# Altium PCB MP1584s.PcbDoc
Units mm, origin at the board's own origin, x right, y up, seen from the top; angles counter-clockwise.
Board outline 32 x 21.13 mm, 2 copper layers (Top Layer, Bottom Layer); 30 components, 11 nets, 71 pads, 205 vias.
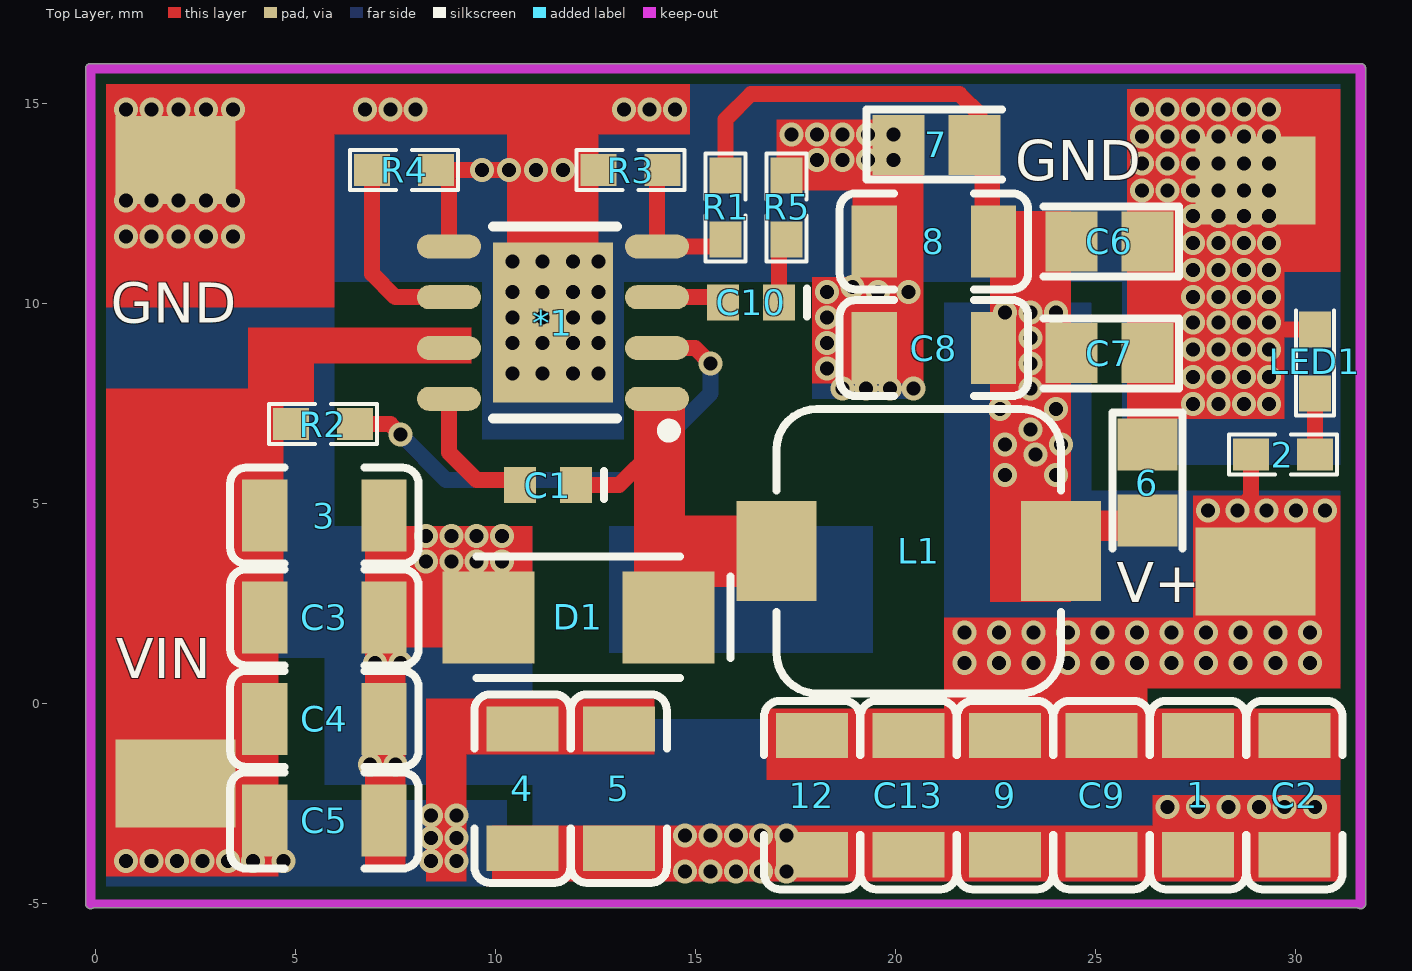
[diagram p0: Top Layer view]
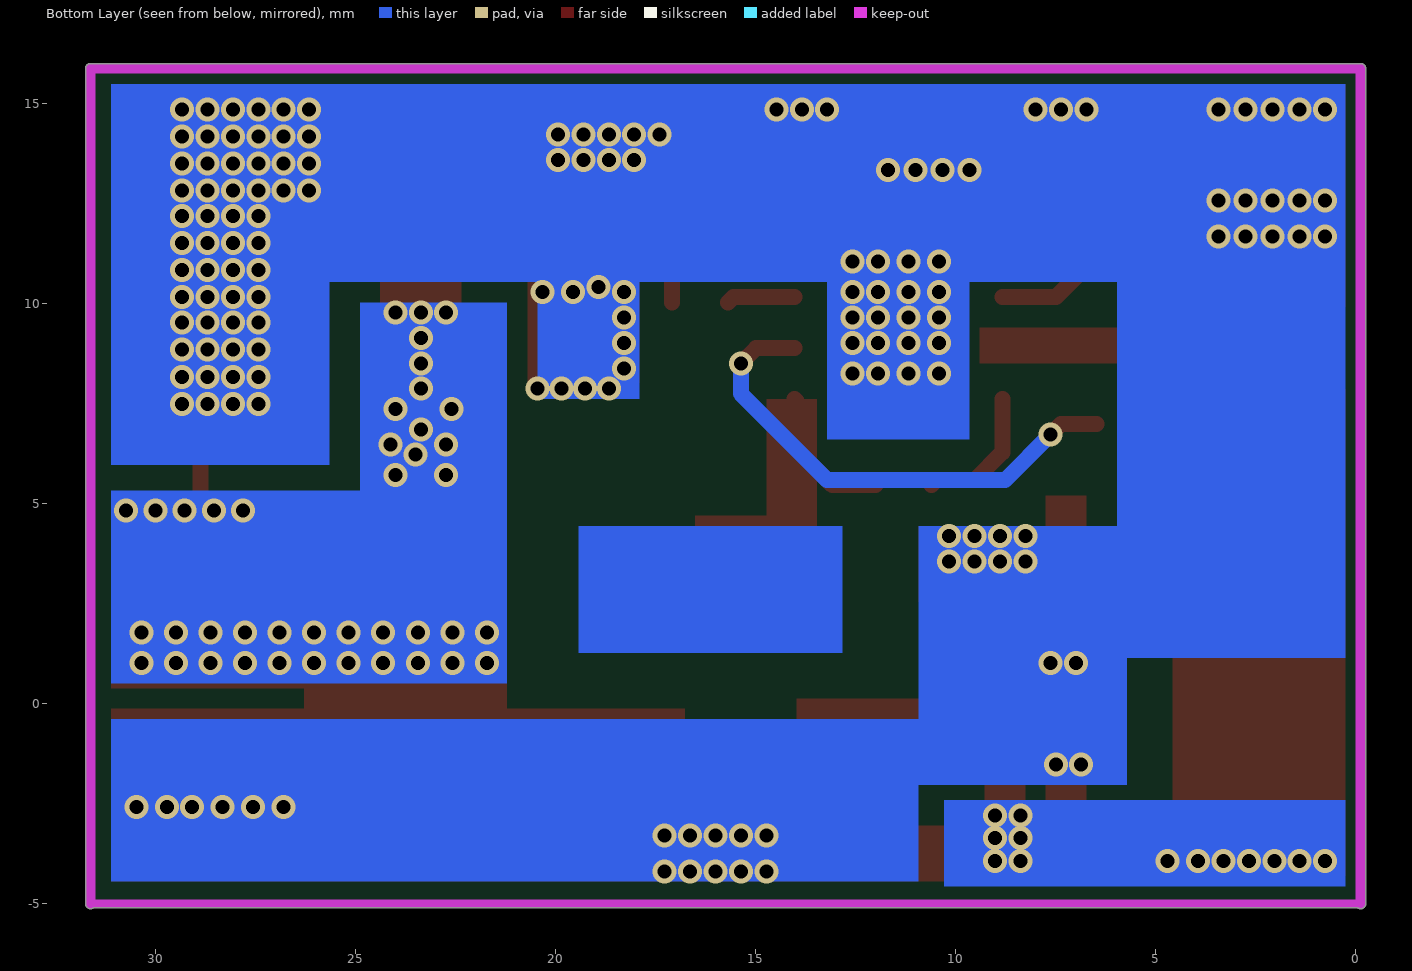
[diagram p1: Bottom Layer view, seen from below]

## Layer stack, top to bottom
Top Solder: solder mask 0.0102, Solder Resist, Dk 3.5
Top Layer: signal copper 0.0356
Dielectric 1: dielectric 0.32, FR-4, Dk 4.8
Bottom Layer: signal copper 0.0356
Bottom Solder: solder mask 0.0102, Solder Resist, Dk 3.5

## Board outline
-0.254,-5 -0.254,15.875 cw(c-0.127,15.875) -0.127,16.002 31.623,16.002 cw(c31.623,15.875) 31.75,15.875 31.75,-5 cw(c31.623,-5) 31.545,-5.1 -0.049,-5.1 cw(c-0.127,-5)

## Design rules (kind name [scope] priority, off if disabled: settings)
Clearance [All] p1: gap=0.254 ignorepadtopadclearanceinfootprint=FALSE except(0: Arc-Hole Track-Hole SMDPad-Hole THPad-Hole Via-Hole Fill-Hole Poly-Hole Region-Hole Text-Hole)
PolygonConnect [All] p1: connectstyle=Relief reliefconductorwidth=0.254 reliefentries=4 polygonreliefangle="90 Angle" airgapwidth=0.254
RoutingVias [All] p1: holewidth=0.4 width=0.6 viastyle="Through Hole" minholewidth=0.4 minwidth=0.6 maxholewidth=22 maxwidth=55
SolderMaskExpansion [All] p1: expansion=0.102
Width [All] p1: maxlimit=55 minlimit=0.254 preferedwidth=0.254
30 further rules are at their usual default settings.

## Components (designator, comment, footprint, x,y, rotation, side; value= is the part's Value field where it differs from the comment)
1 "10UF" LC-1206_C 27.559,-2.286 r90 top
2 "470R" R-0603 30.48,6.223 r180 top
3 "10UF" LC-1206_C 5.715,4.699 r180 top
4 "10UF" LC-1206_C 10.668,-2.125 r90 top
5 "10UF" LC-1206_C 13.081,-2.125 r90 top
6 "22UF" C-0805 26.289,6.477 r270 top
7 "22UF" C-0805 20.066,13.97 r0 top
8 "10UF" LC-1206_C 20.955,11.557 r0 top
9 "10UF" LC-1206_C 22.733,-2.286 r90 top
12 "10UF" LC-1206_C 17.907,-2.286 r90 top
*1 "MP1584DN" LC-SOIC-8_EP_150mil 11.43,9.525 r90 top
C1 "100NF" CAPC1608L 11.303,5.461 r180 top
C2 "10UF" LC-1206_C 29.972,-2.286 r90 top
C3 "10UF" LC-1206_C 5.715,2.159 r180 top
C4 "10UF" LC-1206_C 5.715,-0.381 r180 top
C5 "10UF" LC-1206_C 5.715,-2.921 r180 top
C6 "22UF" C-0805 26.289,11.557 r180 top
C7 "22UF" C-0805 26.289,8.763 r180 top
C8 "10UF" LC-1206_C 20.955,8.89 r0 top
C9 "10UF" LC-1206_C 25.146,-2.286 r90 top
C10 "220PF" CAPC1608L 16.383,10.033 r180 top
C13 "10UF" LC-1206_C 20.32,-2.286 r90 top
D1 "D-Schottky" DIODE-SMA 12.065,2.159 r0 top
L1 "Inductor" L-SMD-7 20.574,3.81 r0 top
LED1 "red" L-0603 30.48,7.747 r90 top
R1 "150K" R-0603 15.748,13.208 r270 top
R2 "100K" R-0603 6.477,6.985 r180 top
R3 "35K" R-0603 12.573,13.335 r0 top
R4 "200K" R-0603 8.509,13.335 r180 top
R5 "68.1K" R-0603 17.272,13.208 r270 top

## Footprints (in the part's own frame and the unit in brackets; to place one, negate y for a bottom-side part, rotate by r counter-clockwise, add the part's x,y. Pads: shape width x height; smd on the part's side, far side on the other; paste and mask are expansions set on the pad)
C-0805 [mm]
  rect 1.3x1.5 smd: 1(0,0) 2(1.9,0)
  silkscreen extent -0.8,-0.87 2.6,0.88
CAPC1608L [mm] "Chip Capacitor, Body 1.6x0.8mm, IPC High Density"
  rect 0.8x0.9 smd: 1(-0.7,0) 2(0.7,0)
  silkscreen extent -1.4,-0.35 -1.4,0.35, body extent -0.87,-0.48 0.87,0.48, height 0.85
DIODE-SMA [mm] "贴片二极管"
  rect 2.3x2.3 smd: 1(-2.25,0) 2(2.25,0)
  silkscreen extent -2.54,-1.52 3.81,1.52, body extent -2.92,-1.4 2.92,1.4, height 3
L-0603 [mm]
  rect 0.9x0.8 smd: 1(0,0) 2(1.6,0)
  silkscreen extent -0.55,-0.48 2.08,0.47
L-SMD-7 [mm] "贴片电感7*7"
  rect 2x2.5 smd: 1(-3.556,0) 2(3.556,0)
  silkscreen extent -3.56,-3.56 3.56,3.56, body extent -3.56,-3.56 3.56,3.56, height 4
LC-1206_C [mm]
  rect 1.13x1.8 smd: 1(-1.49,0) 2(1.49,0)
  silkscreen extent -2.36,-1.2 2.35,1.2, body extent -1.6,-0.81 1.6,0.79, height 1
LC-SOIC-8_EP_150mil [mm]
  rect 4x3 smd: 0(0,0)
  oval 0.6x1.6 smd: 1(-1.905,-2.6) 2(-0.635,-2.6) 3(0.635,-2.6) 4(1.905,-2.6) 5(1.905,2.6) 6(0.635,2.6) 7(-0.635,2.6) 8(-1.905,2.6)
  silkscreen extent -2.85,-3.05 2.4,1.5
R-0603 [mm]
  rect 0.9x0.8 smd: 1(0,0) 2(1.6,0)
  silkscreen extent -0.55,-0.5 2.15,0.5

## Part data
1 3 4 5 6 7 8 9 12 C2 C3 C4 C5 C6 C7 C8 C9 C13: library part CAP, "Capacitor"
2 R1 R2 R3 R4 R5: library part RES, "Resistor"
C1 C10: library part C0603-100nF/50V, "X7R"
D1: "肖特基二极管"
L1: library part Inductor_2, "电感"
LED1: library part LED, "Typical RED, GREEN, YELLOW, AMBER GaAs LED"

## Free pads (board coordinates)
  rect 3x2.2 smd: 0(2,13.589) 1(2,-2) 2(29,3.302) 3(29,13.081)

## Via types
v1: diameter 0.6, hole 0.35, Top Layer to Bottom Layer, 205 vias

## Nets (pads, with @x,y where several pads share a name; then routed paths per layer and width w, separated by ;. In a path a pad name is that pad's centre, name@x,y a point inside that pad or via, vN(x,y) a via of type N, cw(c..) or ccw(c..) an arc to the next point about the centre after c; other vN are vias at no path point)
5V5: 1.2 2.2 6.2 7.2 8.2 9.2 12.2 C2.2 C6.2 C7.2 C8.2 C9.2 C13.2 L1.2 pad.2 R1.1 | length 10.6
  Top Layer w0.4: R1.1 15.748,14.605 16.383,15.24 21.59,15.24 22.098,14.732 21.966,14.6 7.2 ; v1(28.543,4.826) 28.88,5.163 2.2
  other v1: 21.717,1.016 22.581,1.016 23.444,1.016 24.308,1.016 25.171,1.016 26.035,1.016 26.899,1.016 27.762,1.016 28.626,1.016 29.489,1.016 30.353,1.016 21.717,1.778 22.581,1.778 23.444,1.778 24.308,1.778 25.171,1.778 26.035,1.778 26.899,1.778 27.762,1.778 28.626,1.778 29.489,1.778 30.353,1.778 27.813,4.826 29.273,4.826 30.004,4.826 30.734,4.826 22.733,5.715 24.003,5.715 23.495,6.223 22.733,6.477 24.13,6.477 23.368,6.858 22.606,7.366 24.003,7.366 23.368,7.874 23.368,8.509 23.368,9.144 22.733,9.779 23.368,9.779 24.003,9.779
GND: 1.1 3.1 4.1 5.1 6.1 7.1 8.1 9.1 12.1 *1.0 *1.5 C2.1 C3.1 C4.1 C5.1 C6.1 C7.1 C8.1 C9.1 C13.1 D1.1 LED1.2 pad.0 pad.3 R3.1 R4.1 R5.1 | length 7.3
  Top Layer w0.4: *1.5 8.83,13.014 R4.1 R3.1 ; v1(29.337,9.525) 29.515,9.347 LED1.2
  other v1: 14.732,-4.191 15.367,-4.191 16.002,-4.191 16.637,-4.191 17.272,-4.191 14.732,-3.302 15.367,-3.302 16.002,-3.302 16.637,-3.302 17.272,-3.302 26.797,-2.586 27.559,-2.586 28.321,-2.586 29.083,-2.586 29.718,-2.586 30.48,-2.586 6.858,-1.524 7.493,-1.524 6.985,1.016 7.62,1.016 8.255,3.556 8.89,3.556 9.525,3.556 10.16,3.556 8.255,4.191 8.89,4.191 9.525,4.191 10.16,4.191 27.432,7.493 28.067,7.493 28.702,7.493 29.337,7.493 18.669,7.874 19.262,7.874 19.854,7.874 20.447,7.874 27.432,8.17 28.067,8.17 28.702,8.17 29.337,8.17 10.414,8.255 11.176,8.255 11.938,8.255 12.573,8.255 18.288,8.382 27.432,8.848 28.067,8.848 28.702,8.848 29.337,8.848 10.414,9.017 11.176,9.017 11.938,9.017 12.573,9.017 18.288,9.017 27.432,9.525 28.067,9.525 28.702,9.525 10.414,9.652 11.176,9.652 11.938,9.652 12.573,9.652 18.288,9.652 27.432,10.16 28.067,10.16 28.702,10.16 29.337,10.16 10.414,10.287 11.176,10.287 11.938,10.287 12.573,10.287 18.288,10.287 19.558,10.287 20.32,10.287 18.923,10.414 27.432,10.837 28.067,10.837 28.702,10.837 29.337,10.837 10.414,11.049 11.176,11.049 11.938,11.049 12.573,11.049 27.432,11.515 28.067,11.515 28.702,11.515 29.337,11.515 0.762,11.684 1.397,11.684 2.074,11.684 2.752,11.684 3.429,11.684 27.432,12.192 28.067,12.192 28.702,12.192 29.337,12.192 0.762,12.573 1.397,12.573 2.074,12.573 2.752,12.573 3.429,12.573 26.162,12.827 26.797,12.827 27.432,12.827 28.067,12.827 28.702,12.827 29.337,12.827 9.652,13.335 10.329,13.335 11.007,13.335 11.684,13.335 26.162,13.504 26.797,13.504 27.432,13.504 28.067,13.504 28.702,13.504 29.337,13.504 18.034,13.589 18.669,13.589 19.304,13.589 19.939,13.589 26.162,14.182 26.797,14.182 27.432,14.182 28.067,14.182 28.702,14.182 29.337,14.182 17.399,14.224 18.034,14.224 18.669,14.224 19.304,14.224 19.939,14.224 0.762,14.859 1.397,14.859 2.074,14.859 2.752,14.859 3.429,14.859 6.731,14.859 7.366,14.859 8.001,14.859 13.208,14.859 13.843,14.859 14.478,14.859 26.162,14.859 26.797,14.859 27.432,14.859 28.067,14.859 28.702,14.859 29.337,14.859
Net2_1: 2.1 LED1.1 | length 1.5
  Top Layer w0.4: 2.1 LED1.1
Net*1_1: *1.1 C1.1 D1.2 L1.1 | length 3.6
  Top Layer w0.4: C1.1 13.081,5.461 13.97,6.35 13.97,7.56 *1.1
Net*1_2: *1.2 R2.1 | length 12.6
  Top Layer w0.4: R2.1 7.366,6.985 v1(7.62,6.731) ; *1.2 14.986,8.89 v1(15.367,8.509)
  Bottom Layer w0.4: v1(7.62,6.731) 8.763,5.588 13.208,5.588 15.367,7.747 v1(15.367,8.509)
Net*1_3: *1.3 C10.2 | length 1.7
  Top Layer w0.4: *1.3 15.556,10.16 C10.2
Net*1_4: *1.4 R1.2 R3.2 | length 3.8
  Top Layer w0.4: R3.2 14.03,13.192 *1.4 15.57,11.43 R1.2
Net*1_6: *1.6 R4.2 | length 4.8
  Top Layer w0.4: R4.2 6.909,10.744 7.493,10.16 *1.6
Net*1_8: *1.8 C1.2 | length 3.5
  Top Layer w0.4: *1.8 8.83,6.283 9.525,5.588 10.476,5.588 C1.2
NetC10_1: C10.1 R5.2 | length 1.7
  Top Layer w0.4: C10.1 17.083,11.419 R5.2
VIN: 3.2 4.2 5.2 *1.7 C3.2 C4.2 C5.2 pad.1 R2.2
  other v1: 0.762,-3.937 1.397,-3.937 2.032,-3.937 2.667,-3.937 3.302,-3.937 3.937,-3.937 4.699,-3.937 8.382,-3.937 9.017,-3.937 8.382,-3.365 9.017,-3.365 8.382,-2.794 9.017,-2.794

## Keep-outs
Keep-Out Layer:
  lines w0.2: -0.127,-5 31.623,-5
  lines w0.254: -0.127,-5 -0.127,15.875 31.623,15.875 31.623,-5

## Other copper
Top Layer:
  rectangle net GND: 26.416,-3.048 31.115,-2.286
  rectangle net 5V5: 21.209,-0.381 26.289,0.381
  rectangle net 5V5: 16.764,-1.905 31.115,-0.127
  rectangle net GND: 6.731,-4.191 7.747,1.397
  rectangle net VIN: 8.255,-4.445 9.271,0.127
  rectangle net VIN: 8.255,-1.27 13.97,0.127
  rectangle net GND: 9.906,-4.445 31.115,-3.048
  rectangle net 5V5: 21.209,0.381 29.337,2.159
  rectangle net 5V5: 27.432,0.381 31.115,5.207
  rectangle net GND: 10.287,13.081 12.573,14.732
  rectangle net GND: 5.969,14.224 14.859,15.494
  rectangle net GND: 0.254,9.906 5.969,15.494
  rectangle net VIN: 0.254,-4.318 4.572,7.874
  rectangle net GND: 26.162,7.112 29.718,10.795
  rectangle net GND: 25.781,10.795 31.115,15.367
  rectangle net GND: 17.907,8.001 20.701,10.668
  rectangle net GND: 18.923,8.001 20.701,12.827
  rectangle net GND: 17.018,12.827 20.701,14.605
  rectangle net GND: 10.287,11.43 12.573,13.335
  rectangle net GND: 7.62,2.54 10.922,4.445
  rectangle net GND: 6.985,1.397 10.668,3.048
  rectangle net GND: 6.731,1.397 7.747,5.207
  rectangle net VIN: 3.81,8.509 9.398,9.398
  rectangle net VIN: 3.81,7.493 5.461,9.398
  rectangle net VIN: 3.81,1.397 4.699,7.493
  rectangle net 5V5: 21.971,12.192 22.611,13.97
  rectangle net GND: 25.781,6.604 26.67,12.065
  rectangle net 5V5: 24.765,4.064 26.797,4.826
  rectangle net 5V5: 22.352,2.54 24.384,12.319
  rectangle net Net*1_1: 14.732,2.921 16.51,4.699
  rectangle net Net*1_1: 13.462,2.921 14.732,7.62
Bottom Layer:
  rectangle net VIN: 0.254,-4.572 10.287,-2.413
  rectangle net GND: 10.922,-4.445 31.115,-0.381
  rectangle net GND: 5.715,-2.032 10.922,1.143
  rectangle: 12.827,1.27 19.431,4.445
  rectangle net 5V5: 21.209,0.508 31.115,5.334
  rectangle net 5V5: 21.209,0.508 24.892,10.033
  rectangle net GND: 9.652,6.604 13.208,10.668
  rectangle net GND: 17.907,7.62 20.447,10.668
  rectangle net GND: 25.654,5.969 31.115,15.494
  rectangle net GND: 0.254,10.541 31.115,15.494
  rectangle net GND: 0.254,1.143 5.969,15.494
  rectangle net GND: 0.254,1.143 10.922,4.445

## Silkscreen, mask and mechanical layers (free items; w line width, h text height)
Top Overlay:
  text "GND" at 22.987,13.081 h1
  text "GND" at 0.381,9.525 h1
  text "V+" at 25.527,2.54 h1
  text "VIN" at 0.508,0.635 h1
Bottom Solder:
  text "TAOXUN" at 19.05,2.286 h1